# Altium PCB Spannungsregler.PcbDoc
Units mm, origin at the board's own origin, x right, y up, seen from the top; angles counter-clockwise.
Board outline 31.75 x 26.67 mm, 2 copper layers (Top Layer, Bottom Layer); 26 components, 13 nets, 63 pads, 3 vias.
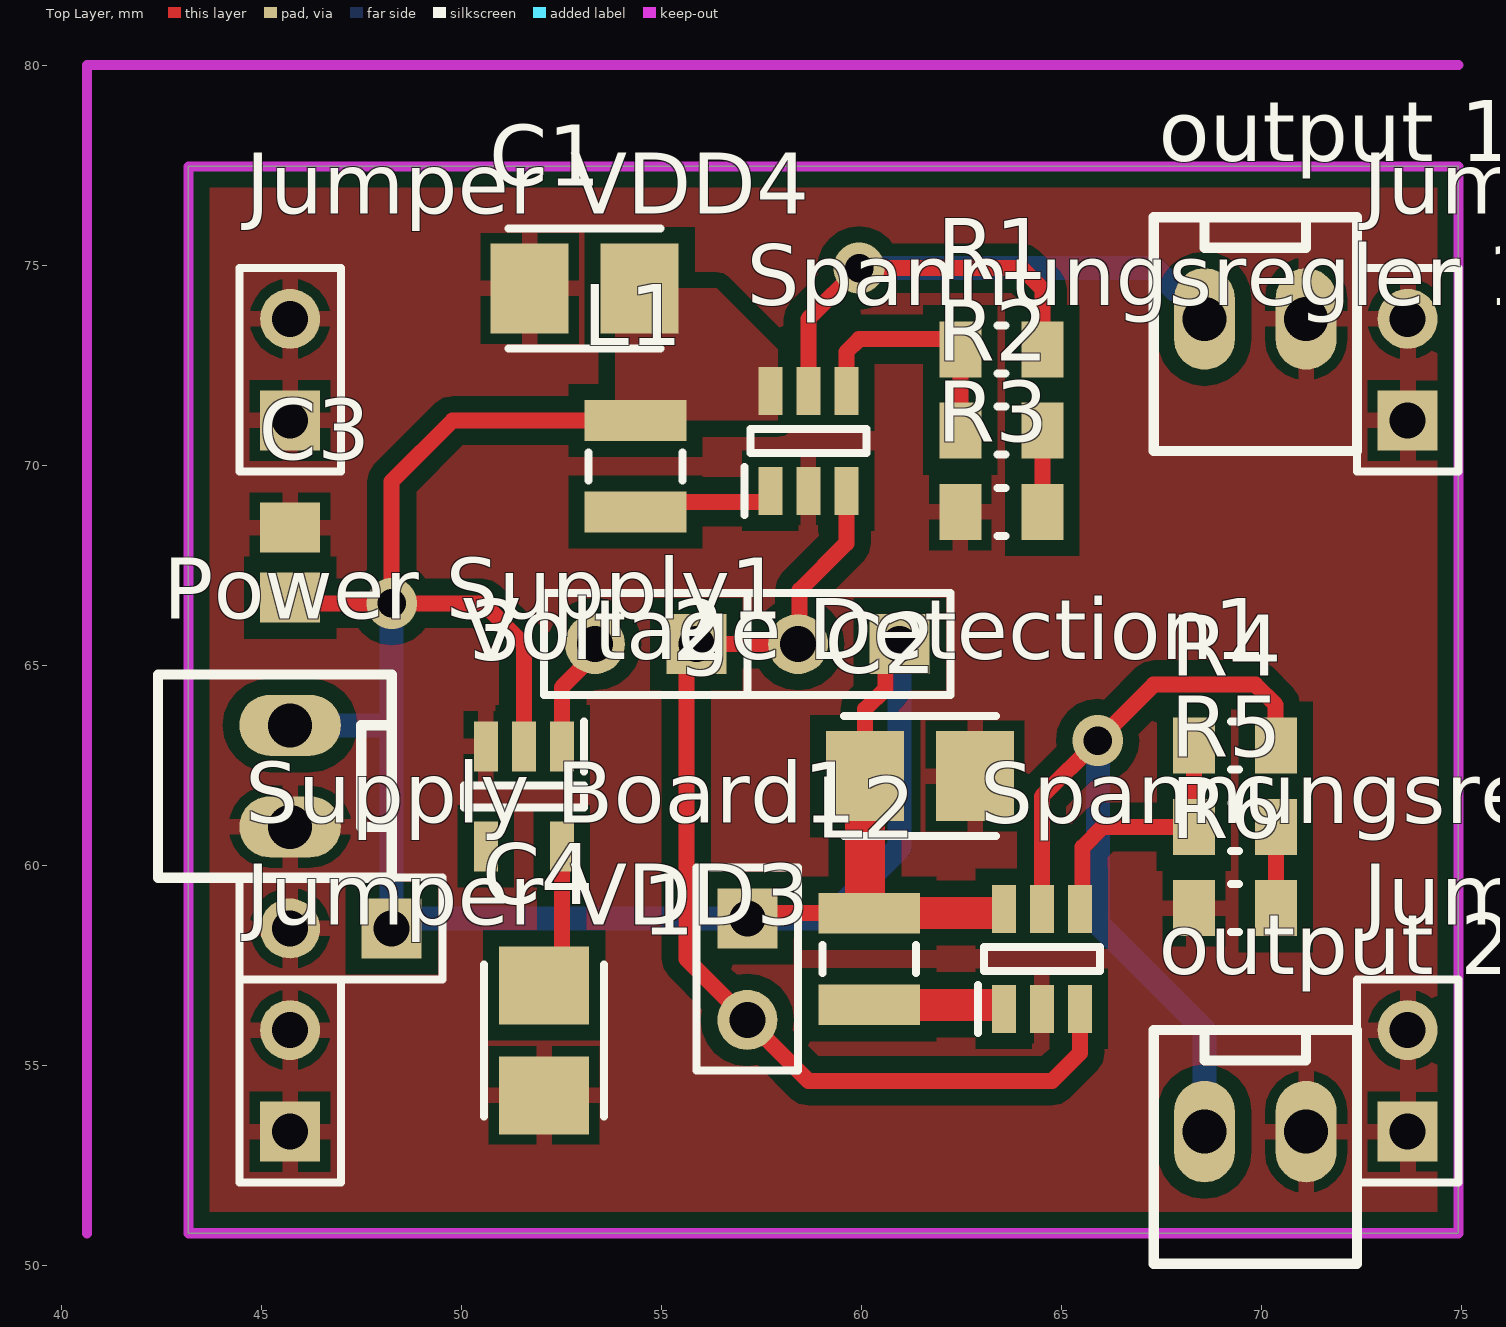
[diagram p0: Top Layer view]
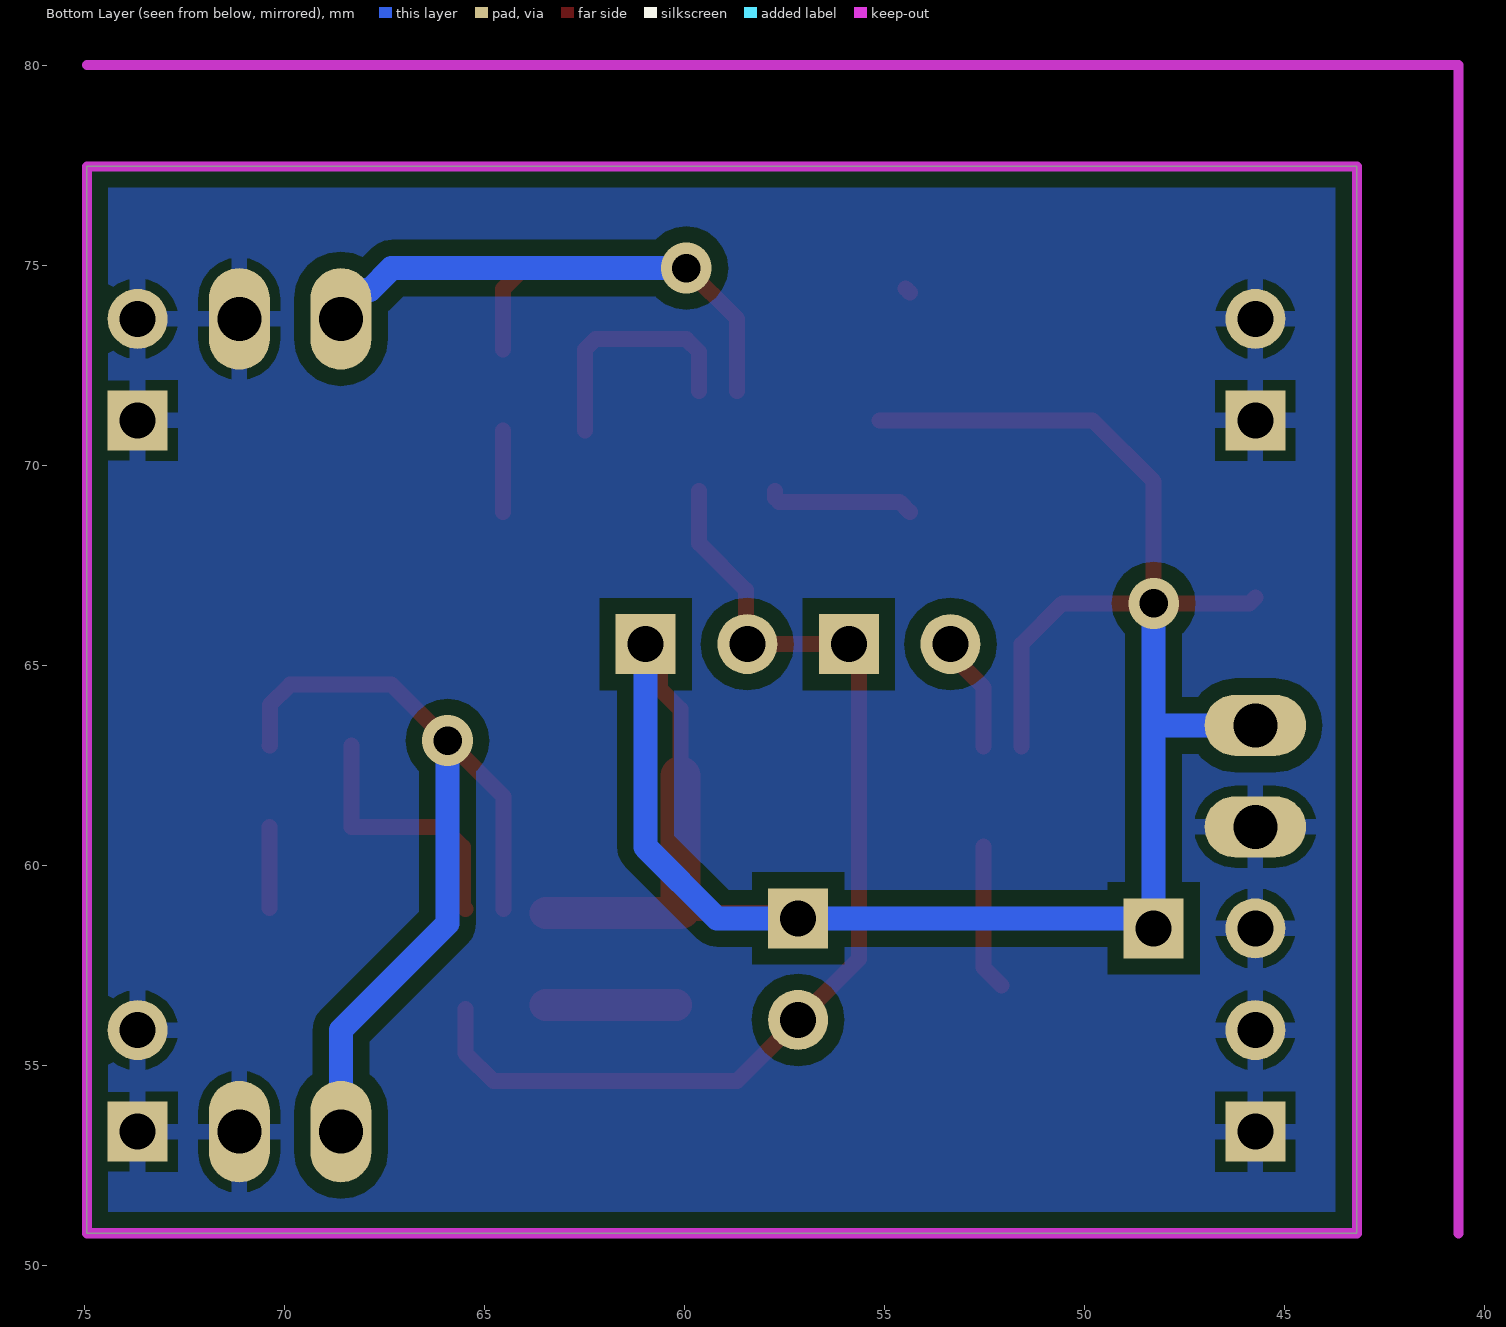
[diagram p1: Bottom Layer view, seen from below]
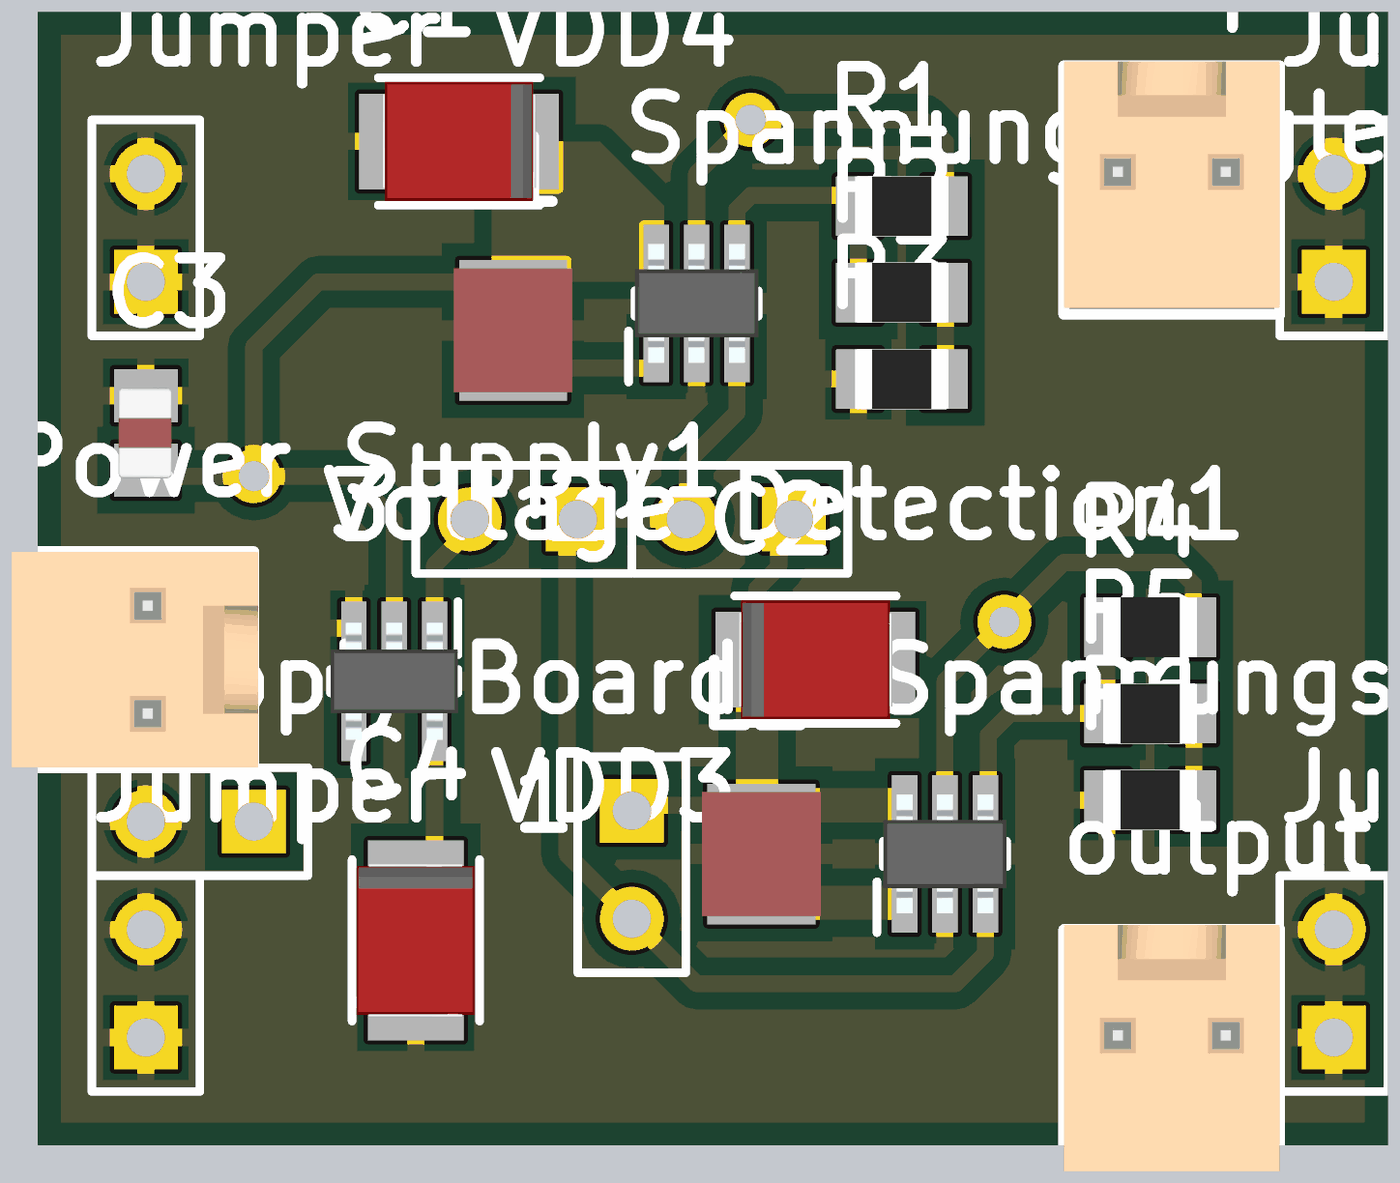
[diagram p2: 3D render of the assembled board from above, using the file's embedded part models]

## Layer stack, top to bottom
Top Solder: solder mask 0.0102, Solder Resist, Dk 3.5
Top Layer: signal copper 0.0356
Dielectric 1: dielectric 0.32, FR-4, Dk 4.8
Bottom Layer: signal copper 0.0356
Bottom Solder: solder mask 0.0102, Solder Resist, Dk 3.5

## Board outline
43.18,50.8 43.18,77.47 74.93,77.47 74.93,50.8

## Design rules (kind name [scope] priority, off if disabled: settings)
Clearance [All] p1: gap=0.4 ignorepadtopadclearanceinfootprint=FALSE
Height [All] p1 off: minheight=0 maxheight=25.4 prefheight=12.7
PlaneConnect [All] p1: planeconnectstyle=Relief reliefexpansion=0.508 reliefentries=4 reliefconductorwidth=0.4 reliefairgap=0.254
PolygonConnect PolygonConnect_1 [All vs IsNamedPolygon('VCC_L01_P000')] p1: thpad.connectstyle=Direct thpad.reliefconductorwidth=0.254 thpad.reliefentries=4 thpad.polygonreliefangle="90 Angle" thpad.airgapwidth=0.254 smdpad.connectstyle=Direct smdpad.reliefconductorwidth=0.254 smdpad.reliefentries=4 smdpad.polygonreliefangle="90 Angle" smdpad.airgapwidth=0.254 via.connectstyle=Relief via.reliefconductorwidth=0.254 via.reliefentries=4 via.polygonreliefangle="90 Angle" via.airgapwidth=0.254
PolygonConnect [All] p2: connectstyle=Relief reliefconductorwidth=0.4 reliefentries=4 polygonreliefangle="90 Angle" airgapwidth=0.254
RoutingVias [All] p1: holewidth=0.711 width=1.6 viastyle="Through Hole" minholewidth=0.711 minwidth=1.6 maxholewidth=0.711 maxwidth=1.6
SilkToSolderMaskClearance [IsPad] p1 off: minsilkscreentomaskgap=0.254 clearancetoexposedcopper=TRUE
SolderMaskExpansion [All] p1: expansion=0.102 istentingtop=FALSE
Width [All] p1: maxlimit=1 minlimit=0.3 preferedwidth=0.4
27 further rules are at their usual default settings.

## Components (designator, comment, footprint, x,y, rotation, side; value= is the part's Value field where it differs from the comment)
1 "Header 2" HDR1X2 57.15,58.674 r270 top
2 "Header 2" HDR1X2 60.96,65.532 r180 top
3 "Header 2" HDR1X2 55.88,65.532 r180 top
C1 "SOLID TANTALUM CHIP CAPACITOR" "C, Typ B, Tantal, T491" 53.086,74.422 r180 top
C2 "SOLID TANTALUM CHIP CAPACITOR" "C, Typ B, Tantal, T491" 61.468,62.23 r0 top
C3 "VJ0805" VJ0805 45.72,67.564 r270 top
C4 "SOLID TANTALUM CHIP CAPACITOR" "C, Typ B, Tantal, T491" 52.07,55.626 r270 top
"Jumper VDD1" "Header 2" HDR1X2 73.66,53.34 r90 top
"Jumper VDD2" "Header 2" HDR1X2 73.66,71.12 r90 top
"Jumper VDD3" "Header 2" HDR1X2 45.72,53.34 r90 top
"Jumper VDD4" "Header 2" HDR1X2 45.72,71.12 r90 top
L1 "Coilcraft_Inductor_1008" "Coilcraft 1008CS Series" 54.356,69.975 r90 top
L2 "Coilcraft_Inductor_1008" "Coilcraft 1008CS Series" 60.198,57.658 r90 top
"output 1" "2er Stiftleiste" "2er Stiftleiste WR-WTB" 68.58,73.66 r0 top
"output 2" "2er Stiftleiste" "2er Stiftleiste WR-WTB" 68.58,53.34 r0 top
"Power Supply1" "2er Stiftleiste" "2er Stiftleiste WR-WTB" 45.72,63.5 r270 top
R1 "RES 0805" D12CRCW0805 63.5,72.898 r0 top
R2 "RES 0805" D12CRCW0805 63.5,70.866 r180 top
R3 "RES 0805" D12CRCW0805 63.5,68.834 r0 top
R4 "RES 0805" D12CRCW0805 69.342,62.992 r0 top
R5 "RES 0805" D12CRCW0805 69.342,60.96 r180 top
R6 "RES 0805" D12CRCW0805 69.342,58.928 r180 top
"Spannungsregler 1" "TLV61220DBVR" SOT95P280X145-6N 58.674,70.612 r90 top
"Spannungsregler 2" "TLV61220DBVR" SOT95P280X145-6N 64.516,57.658 r90 top
"Supply Board1" "Header 2" HDR1X2 48.26,58.42 r180 top
"Voltage Detection1" "NCP302LSN20T1G" SOT95P275X110-5N 51.562,61.722 r270 top

## Footprints (in the part's own frame and the unit in brackets; to place one, negate y for a bottom-side part, rotate by r counter-clockwise, add the part's x,y. Pads: shape width x height; smd on the part's side, far side on the other; paste and mask are expansions set on the pad)
"2er Stiftleiste WR-WTB" [mm] "2.54MM MALE LOCKING HEADER WÜRTH"
  rrect100% 1.524x2.54 hole 1.1: 1(0,0) 2(2.54,0)
  silkscreen extent -1.27,-3.3 3.81,2.54, body extent -1.27,-3.15 3.81,2.65, height 11.55
"C, Typ B, Tantal, T491" [mm] "Solid Tantalum Chip Capacitors Kemet"
  rect 1.95x2.25 smd: 1(-1.375,0) 2(1.375,0)
  silkscreen extent -1.9,-1.5 1.9,1.5, body extent -1.81,-1.4 1.81,1.4, height 1.61
"Coilcraft 1008CS Series" [mm] "Chip Inductors 1008CS Series"
  rect 1.02x2.54 smd: 1(-1.145,0) 2(1.145,0)
  silkscreen extent -0.35,-1.17 0.35,1.17, body extent -1.46,-1.4 1.46,1.39, height 2.03
D12CRCW0805 [mm] "Chip Resistor, 2-Leads, Body 2,1x1,3mm, IPC Medium Density"
  rect 1.05x1.4 smd: 1(-1.025,0) 2(1.025,0)
  silkscreen extent -0.1,-0.6 0.1,0.6, body extent -1.1,-0.71 1.1,0.71, height 0.51
HDR1X2 [mm] "Connector; Header; 2 Position"
  rect 1.5x1.5 hole 0.9: 1(0,0)
  round 1.5 hole 0.9: 2(2.54,0)
  silkscreen extent -1.27,-1.27 3.81,1.27
SOT95P275X110-5N [mm]
  rect 1.25x0.6 smd: 1(-1.25,0.95) 2(-1.25,0) 3(-1.25,-0.95) 4(1.25,-0.95) 5(1.25,0.95)
  silkscreen extent -1.88,-1.5 0.28,1.5, body extent -1.38,-1.5 1.38,1.5, height 1.1
SOT95P280X145-6N [mm]
  rect 1.2x0.6 smd: 1(-1.25,0.95) 2(-1.25,0) 3(-1.25,-0.95) 4(1.25,-0.95) 5(1.25,0) 6(1.25,0.95)
  silkscreen extent -1.85,-1.45 0.3,1.6, body extent -1.4,-1.45 1.4,1.45, height 1.45
VJ0805 [mm] "Ceramic Chip Capacitor Vishay Vitramon"
  rect 1.25x1.5 smd: 1(-0.875,0) 2(0.875,0)
  body extent -1.06,-0.64 1.06,0.61, height 1.45

## Part data
1 2 3 "Jumper VDD1" "Jumper VDD2" "Jumper VDD3" "Jumper VDD4" "Supply Board1": "Header, 2-Pin", LatestRevisionDate=17-Jul-2002, LatestRevisionNote="Re-released for DXP Platform.", Publisher="Altium Limited"
C1 C2 C4: library part "C, Typ B, Tantal, T491, Kemet", Fitted=False
C3: "Ceramic Chip Capacitor Vishay Vitramon", Supplier Part Number 1=1650948, Fitted=False, Supplier 1=Farnell
L1 L2: "Coilcraft 1008"
"output 1" "output 2" "Power Supply1": "2er Stiftleiste WR-WTB 2,54mm"
R1 R2 R3 R4 R5 R6: "Chip Resistor 0805", Supplier Part Number 1=1738935, Fitted=False, Supplier 1=Farnell
"Spannungsregler 1" "Spannungsregler 2": "Integrated Circuit", Manufacturer_Name="Texas Instruments", Mouser2 Part Number=595-TLV61220DBVR, Datasheet Link=http://www.ti.com/lit/gpn/tlv61220, Height=1.45mm, Manufacturer_Part_Number=TLV61220DBVR, Mouser2 Price/Stock=https://www.mouser.com/Search/Refine.aspx?Keyword=595-TLV61220DBVR
"Voltage Detection1": "Integrated Circuit", Manufacturer_Name="ON Semiconductor", Datasheet Link=http://www.onsemi.com/pub/Collateral/NCP302-D.PDF, Height=1.1mm, Manufacturer_Part_Number=NCP302LSN20T1G

## Via types
v1: diameter 1.27, hole 0.711, Top Layer to Bottom Layer, 3 vias

## Nets (pads, with @x,y where several pads share a name; then routed paths per layer and width w, separated by ;. In a path a pad name is that pad's centre, name@x,y a point inside that pad or via, vN(x,y) a via of type N, cw(c..) or ccw(c..) an arc to the next point about the centre after c; other vN are vias at no path point)
1,8V: "output 1.1" "Spannungsregler 1.5" R1.2 | length 19.2
  Top Layer w0.4: 58.674,71.862 58.674,73.66 v1(59.944,74.93) 64.008,74.93 64.525,74.413 R1.2
  Bottom Layer w0.6: v1(59.944,74.93) 67.31,74.93 67.857,74.383 68.061,74.383 68.58,73.864 68.58,73.66
3,3V: "output 2.1" "Spannungsregler 2.5" R4.2 | length 21.9
  Top Layer w0.4: 64.516,58.908 64.516,61.722 v1(65.913,63.119) 67.31,64.516 69.85,64.516 70.358,64.008 70.358,63.001 R4.2
  Bottom Layer w0.6: v1(65.913,63.119) 65.913,58.547 68.58,55.88 68.58,53.34
GND: "Jumper VDD1.1" "Jumper VDD1.2" "Jumper VDD2.1" "Jumper VDD2.2" "Jumper VDD3.1" "Jumper VDD3.2" "Jumper VDD4.1" "Jumper VDD4.2" "output 1.2" "output 2.2" "Power Supply1.2" "Spannungsregler 1.2" "Spannungsregler 2.2" "Supply Board1.2" "Voltage Detection1.3" C1.2 C2.2 C3.1 C4.2 R3.1 R6.2
Net1_2: 1.2 2.2 3.1 "Spannungsregler 1.3" "Spannungsregler 2.3" | length 27.3
  Top Layer w0.4: 59.624,69.362 59.624,68.048 58.458,66.882 58.458,65.57 2.2 3.1 55.626,65.278 55.626,57.658 1.2 58.674,54.61 64.77,54.61 65.466,55.306 65.466,56.408
Net3_2: 3.2 "Voltage Detection1.1" | length 2.9
  Top Layer w0.4: 52.512,62.972 52.512,64.451 53.34,65.279 3.2
NetC4_1: "Voltage Detection1.5" C4.1 | length 3.7
  Top Layer w0.4: C4.1 52.512,57.443 52.512,60.472
NetL1_1: "Spannungsregler 1.1" L1.1 | length 3.7
  Top Layer w0.4: L1.1 54.614,69.088 57.624,69.088 57.724,69.188 57.724,69.362
NetL2_1: "Spannungsregler 2.1" L2.1 | length 3.3
  Top Layer w0.8: L2.1 63.466,56.513
NetR1_1: "Spannungsregler 1.4" R1.1 R2.2 | length 6.1
  Top Layer w0.4: 59.624,71.862 59.624,72.832 59.944,73.152 62.221,73.152 R1.1 R2.2
NetR2_1: R2.1 R3.2 | length 2
  Top Layer w0.4: R3.2 R2.1
NetR4_1: "Spannungsregler 2.4" R4.1 R5.2 | length 6.6
  Top Layer w0.4: 65.466,58.908 65.532,58.974 65.532,60.452 66.04,60.96 R5.2 R4.1
NetR5_1: R5.1 R6.1 | length 2
  Top Layer w0.4: R6.1 R5.1
VCC: 1.1 2.1 "Power Supply1.1" "Spannungsregler 1.6" "Spannungsregler 2.6" "Supply Board1.1" "Voltage Detection1.2" C1.1 C2.1 C3.2 L1.2 L2.2 | length 62.3
  Top Layer w0.4: C3.2 45.861,66.548 v1(48.26,66.548) ; 51.562,62.972 51.562,65.532 50.546,66.548 v1(48.26,66.548) ; C1.1@54.356,74.317 C1.1 ; L1.2@55.116,71.12 L1.2 49.784,71.12 48.26,69.596 v1(48.26,66.548) ; 1.1 57.279,58.803 59.988,58.803 60.093,58.908 L2.2 ; C2.1 60.093,63.903 60.606,64.416 60.606,65.178 2.1
  Top Layer w0.8: L2.2 63.466,58.803
  Top Layer w1: L2.2@60.093,58.908 C2.1
  Bottom Layer w0.6: 45.72,63.5 48.26,63.5 ; v1(48.26,66.548) 48.26,63.5 ; 2.1 60.96,60.452 59.182,58.674 1.1 48.514,58.674 48.26,58.42 48.26,63.5
pads on no net: "Voltage Detection1.4"

## Polygon pours and split planes (outlines as drawn)
GND on Top Layer "GND_L01_P001" (solid, pour order 1): 43.18,77.47 74.93,77.47 74.93,50.8 43.18,50.8
VCC on Top Layer "VCC_L01_P000" (solid, pour order 0): 57.912,72.898 56.388,74.422 53.848,74.422 53.848,71.374 54.102,71.12 57.912,71.12
GND on Bottom Layer "GND_L02_P002" (solid, pour order 2): 43.18,77.47 74.93,77.47 74.93,50.8 43.18,50.8

## Keep-outs
Top Layer:
  lines w0.254: 40.64,50.8 40.64,80.01 74.93,80.01
Bottom Layer:
  lines w0.254: 40.64,50.8 40.64,80.01 74.93,80.01
Keep-Out Layer:
  the board outline again, w0.254